# Altium PCB PCB1.PcbDoc
Units mm, origin at the board's own origin, x right, y up, seen from the top; angles counter-clockwise.
Board outline 55.75 x 63.12 mm, 2 copper layers (Top Layer, Bottom Layer); 26 components, 16 nets, 72 pads, 5 vias.
Unrouted connection lines stored in the file: 3.
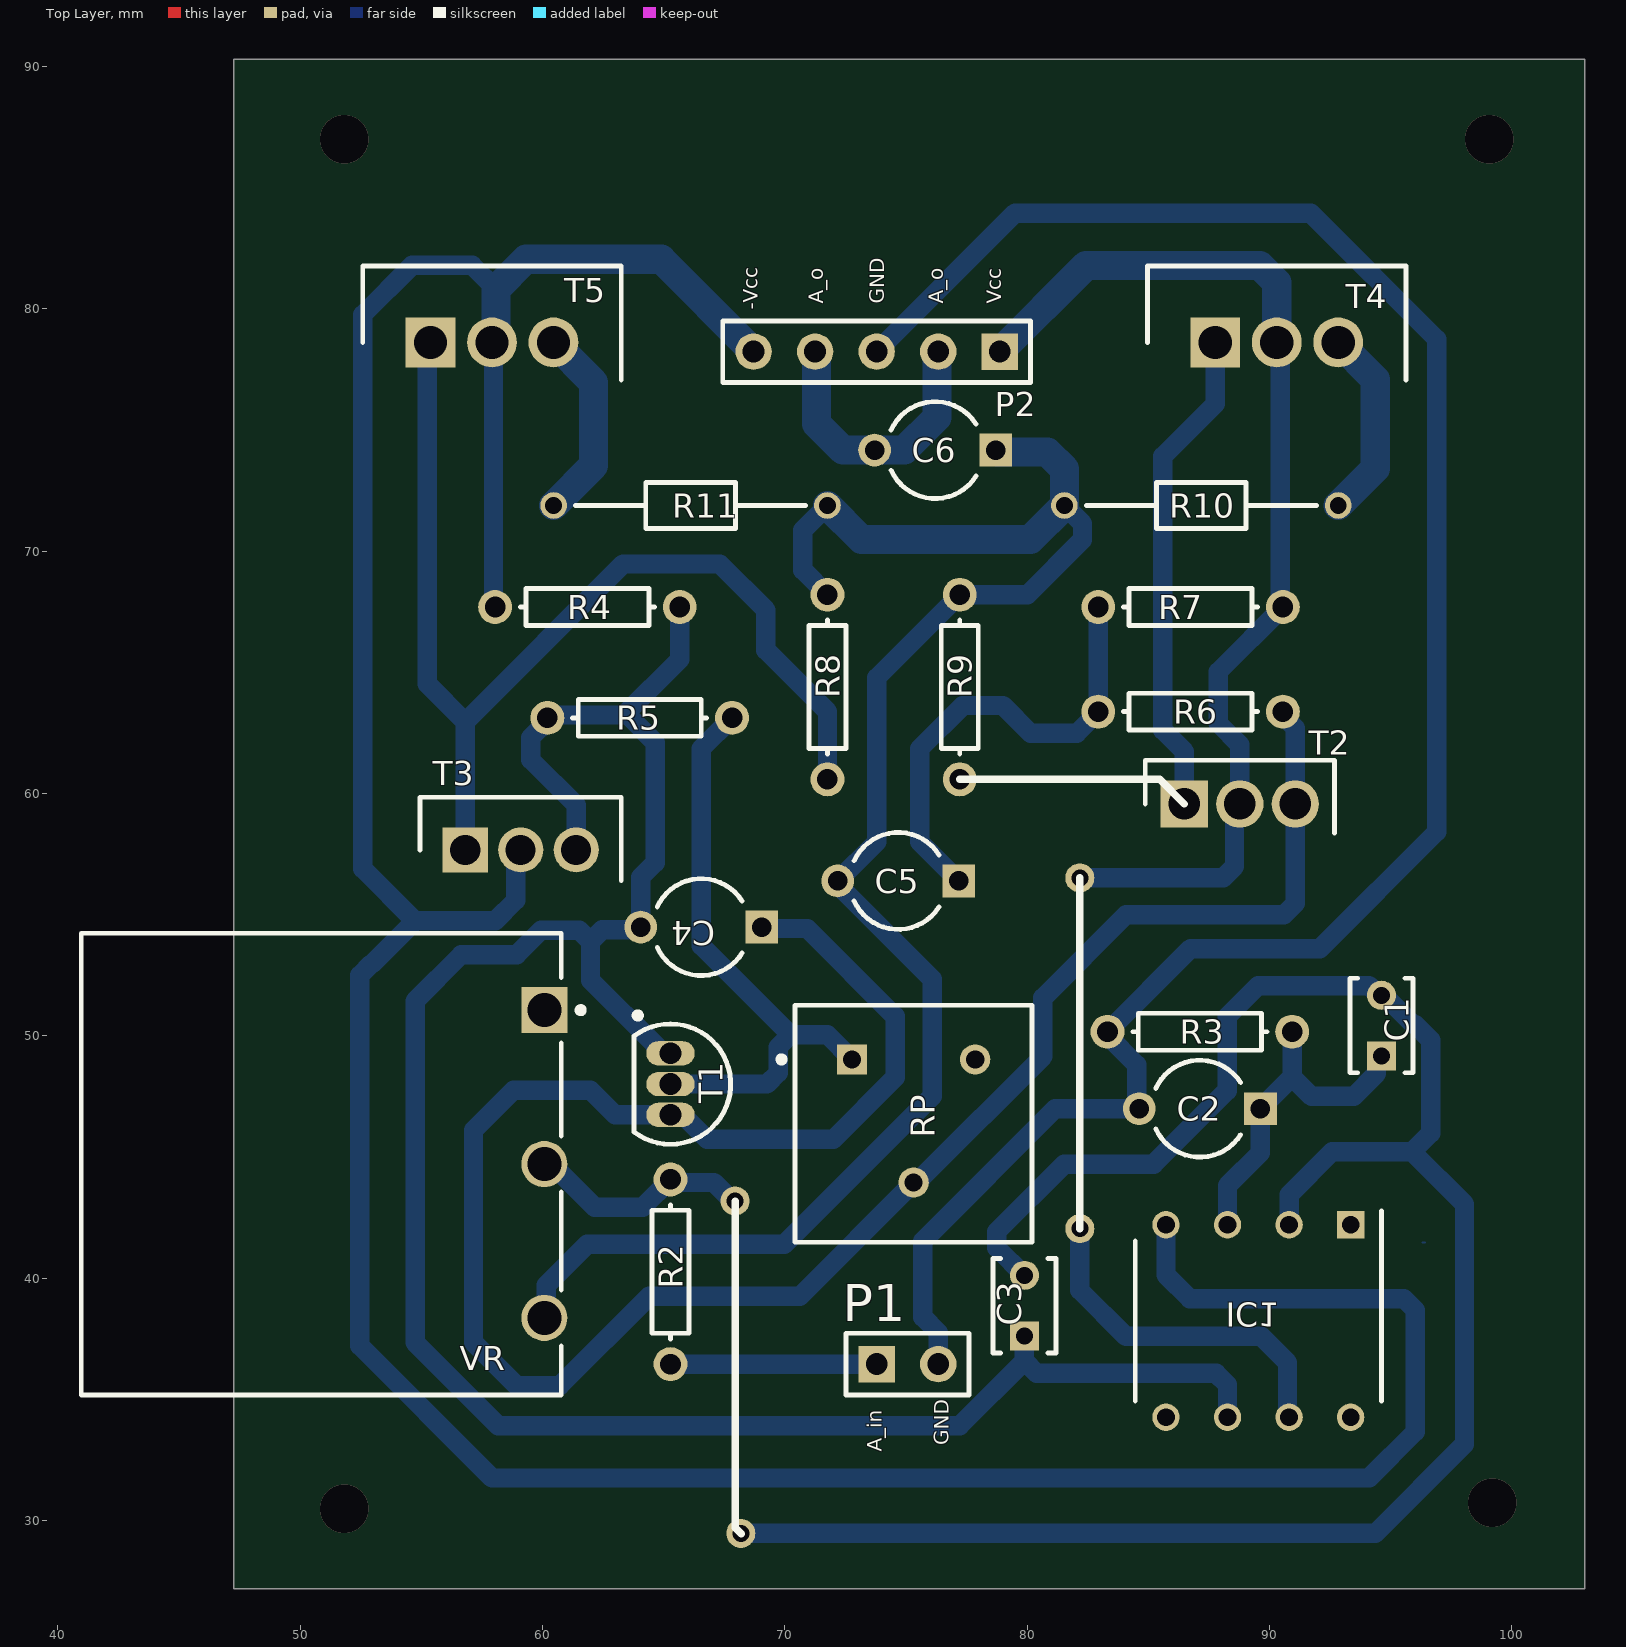
[diagram p0: Top Layer view]
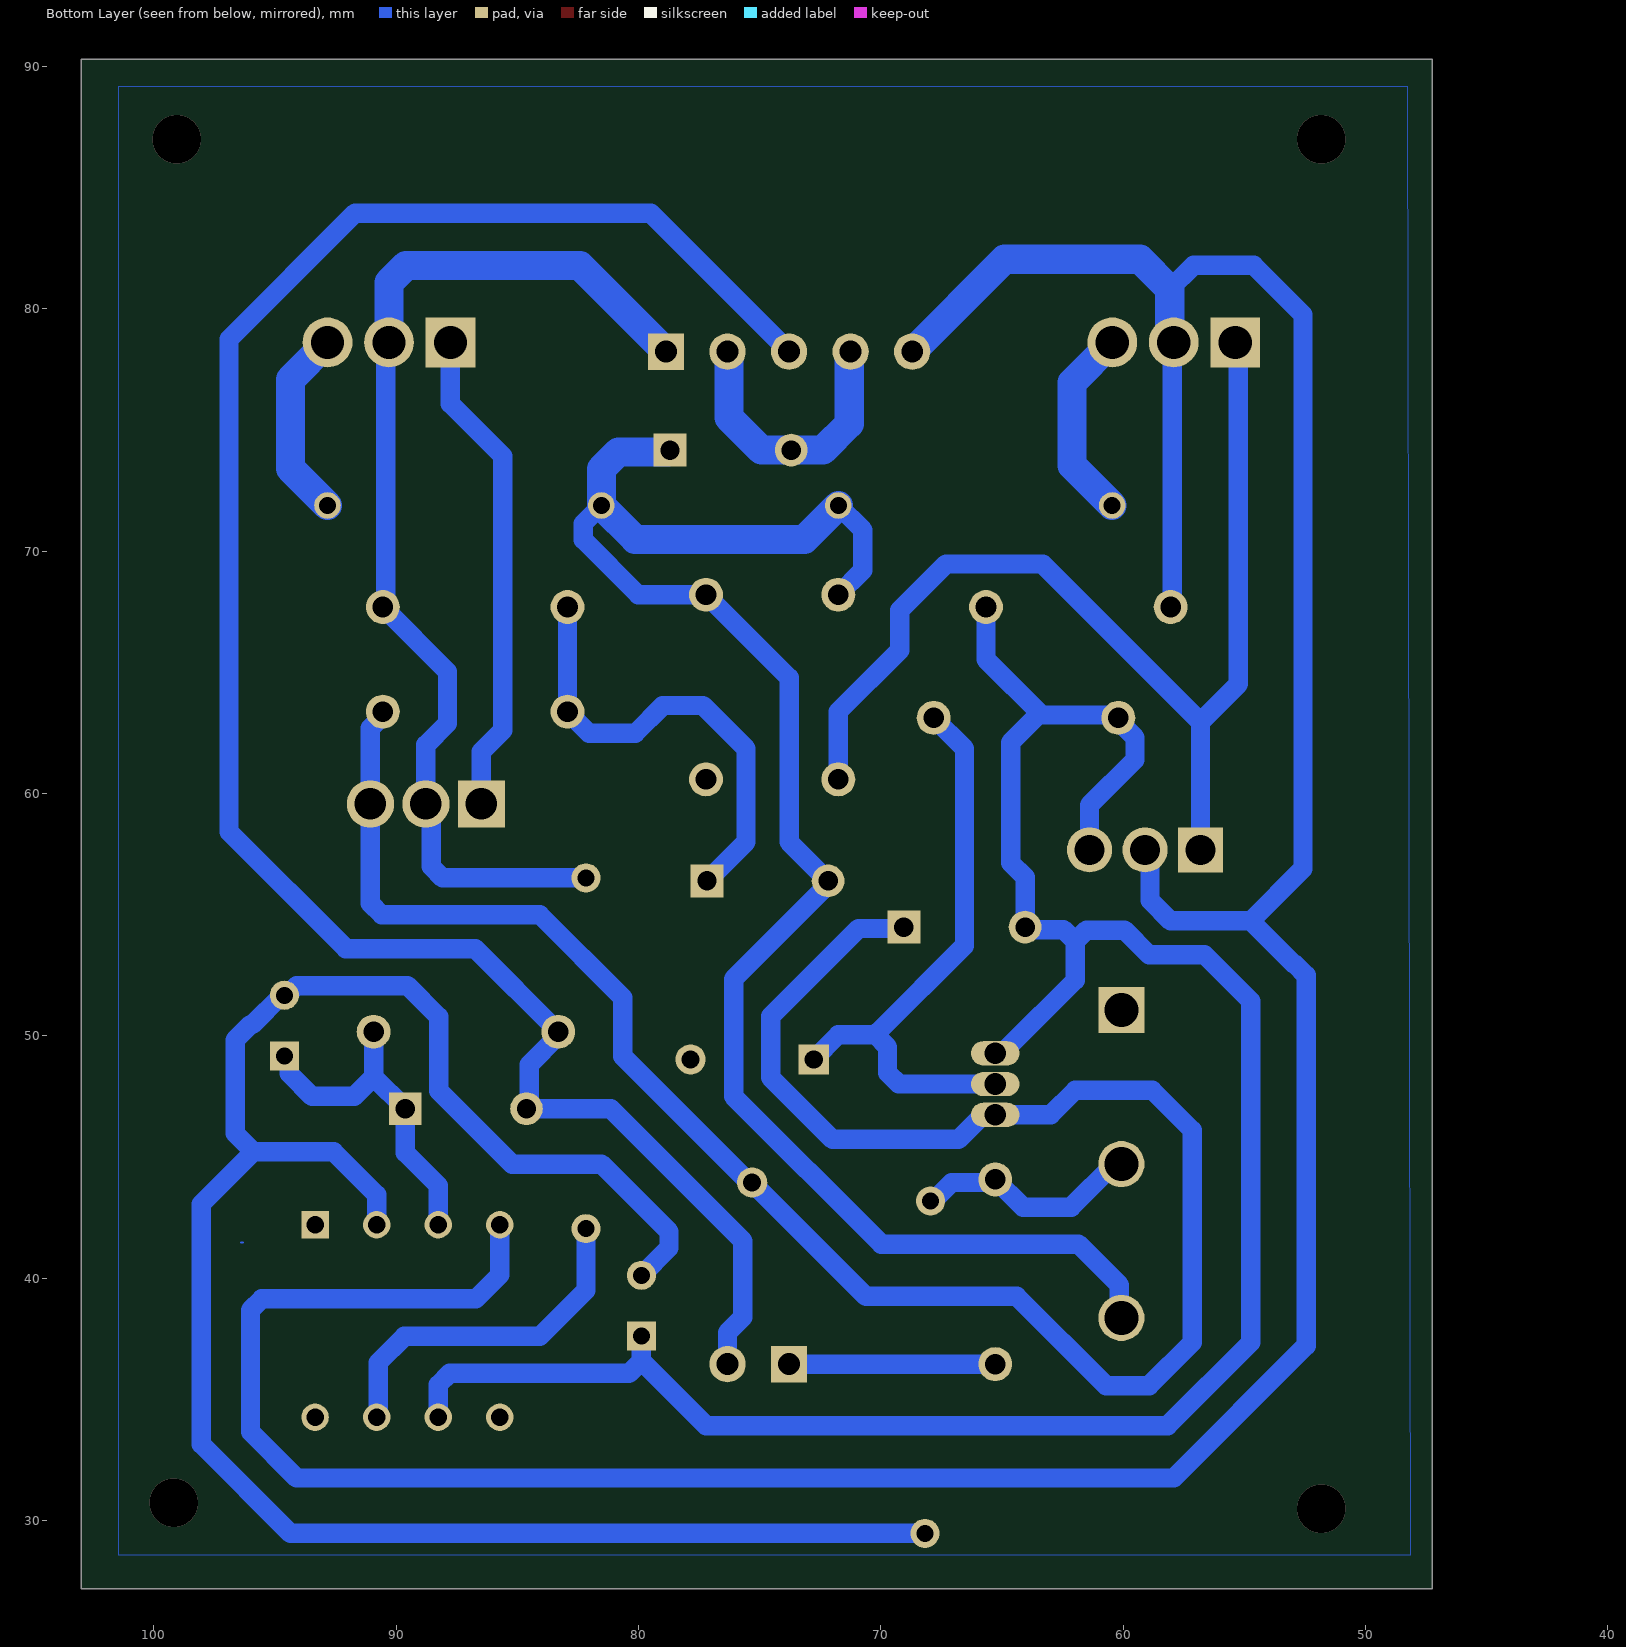
[diagram p1: Bottom Layer view, seen from below]

## Layer stack, top to bottom
Top Solder: solder mask 0.0102, Solder Resist, Dk 3.5
Top Layer: signal copper 0.0356
Dielectric 1: dielectric 0.32, FR-4, Dk 4.8
Bottom Layer: signal copper 0.0356
Bottom Solder: solder mask 0.0102, Solder Resist, Dk 3.5

## Board outline
47.244,27.178 47.244,90.297 102.997,90.297 102.997,27.178

## Design rules (kind name [scope] priority, off if disabled: settings)
Clearance [All] p1: gap=0.8 ignorepadtopadclearanceinfootprint=FALSE except(0: Arc-Hole Track-Hole SMDPad-Hole THPad-Hole Via-Hole Fill-Hole Poly-Hole Region-Hole Text-Hole; 0.3: Arc-SMDPad Arc-Via Arc-Text Track-SMDPad Track-Via Track-Text SMDPad-SMDPad SMDPad-Via SMDPad-Text THPad-Via THPad-Text Via-Via Text-Text; 0.6: Arc-Arc Arc-Track Arc-THPad Track-Track Track-THPad SMDPad-THPad THPad-THPad; 1: Via-Fill Via-Poly Via-Region Fill-Fill Fill-Poly Fill-Region Poly-Poly Poly-Region Region-Region)
PolygonConnect [All] p1: connectstyle=Relief reliefconductorwidth=0.254 reliefentries=4 polygonreliefangle="90 Angle" airgapwidth=0.254
RoutingVias [All] p1: holewidth=0.711 width=1.27 viastyle="Through Hole" minholewidth=0.711 minwidth=1.27 maxholewidth=0.711 maxwidth=1.27
SolderMaskExpansion [All] p1: expansion=0.102 istentingtop=FALSE
Width [All] p1: maxlimit=1.2 minlimit=0.65 preferedwidth=0.8 minimp=50.000000 maximp=50.000000 favimp=50.000000
30 further rules are at their usual default settings.

## Components (designator, comment, footprint, x,y, rotation, side; value= is the part's Value field where it differs from the comment)
C1 "100pF" FP-RHS0DG-MFG 94.615,50.419 r90 top
C2 "Cap2" CAPR5-4X5 87.122,46.99 r180 top value=20uF
C3 "100pF" FP-RHS0DG-MFG 79.883,38.862 r90 top
C4 "Cap2" CAPR5-4X5 66.548,54.483 r180 top value=100uF
C5 "Cap2" CAPR5-4X5 74.676,56.388 r180 top value=100uF
C6 "Cap2" CAPR5-4X5 76.2,74.168 r180 top value=100uF
IC1 "TL071ACP" DIP794W53P254L959H508Q8N 89.535,38.227 r270 top
P1 "Header 2" HDR1X2 73.787,36.449 r0 top
P2 "Header 5" HDR1X5 78.867,78.232 r180 top
R2 "Res1" AXIAL-0.3 65.278,40.259 r270 top value=10k
R3 "Res1" AXIAL-0.3 87.122,50.165 r180 top value=10k
R4 "Res1" AXIAL-0.3 61.849,67.691 r0 top value=10k
R5 "Res1" AXIAL-0.3 64.008,63.119 r0 top value=1k
R6 "Res1" AXIAL-0.3 86.741,63.373 r180 top value=10K
R7 "Res1" AXIAL-0.3 86.741,67.691 r0 top value=10K
R8 "Res1" AXIAL-0.3 71.755,64.389 r90 top value=5.6k
R9 "Res1" AXIAL-0.3 77.216,64.389 r270 top value=5.6K
R10 "2.2ohm" RESAD1130W50L370D190 81.534,71.882 r0 top
R11 "2.2ohm" RESAD1130W50L370D190 60.455,71.882 r0 top
RP "3386F-1-303LF" FP-3386F-MFG 75.311,46.367 r0 top value=30kΩ
T1 "2N3904" TO-92A 65.278,48.006 r180 top
T2 "BD139" TO229P300X760X1364-3P 86.483,59.563 r0 top
T3 "BD140" TO229P345X800X1460-3P 56.807,57.669 r0 top
T4 "TIP31C" TO254P470X1016X2019-3P 87.762,78.613 r0 top
T5 "TIP32A" TO254P470X1016X2019-3P 55.377,78.613 r0 top
VR "100k" BOUR-3852A-282-103AL-3_V 60.071,44.704 r270 top

## Footprints (in the part's own frame and the unit in brackets; to place one, negate y for a bottom-side part, rotate by r counter-clockwise, add the part's x,y. Pads: shape width x height; smd on the part's side, far side on the other; paste and mask are expansions set on the pad)
AXIAL-0.3 [mm] "Axial Device, Thru-Hole; 2 Leads; 0.3 in Pin Spacing"
  round 1.4 hole 0.85: 1(-3.81,0) 2(3.81,0)
  silkscreen extent -2.77,-0.76 2.77,0.76
BOUR-3852A-282-103AL-3_V [mm] "TH, 3-Leads, Body 19.81x19.05mm, Pitch 6.35mm"
  rect 1.9x1.9 hole 1.4: 1(-6.35,0)
  round 1.9 hole 1.4: 2(0,0) 3(6.35,0)
  silkscreen extent -9.53,-19.11 9.53,1.63, body extent -9.52,-19.11 9.52,0.7, height 19.05
CAPR5-4X5 [mm] "Capacitor; 2 Leads"
  rect 1.35x1.35 hole 0.8: 1(-2.5,0)
  round 1.35 hole 0.8: 2(2.5,0)
  silkscreen extent -1.69,-2 1.82,2
DIP794W53P254L959H508Q8N [mm]
  rect 1.13x1.13 hole 0.73: 1(-3.97,3.81)
  round 1.13 hole 0.73: 2(-3.97,1.27) 3(-3.97,-1.27) 4(-3.97,-3.81) 5(3.97,-3.81) 6(3.97,-1.27) 7(3.97,1.27) 8(3.97,3.81)
  silkscreen extent -4.54,-5.08 3.3,5.08, body extent -4.1,-4.64 4.1,4.64, height 4.21
FP-3386F-MFG [mm]
  rect 1.25x1.25 hole 0.75 paste-1000 mask+0: 1(-2.54,2.655)
  round 1.25 hole 0.75 paste-1000 mask+0: 2(0,-2.425) 3(2.54,2.655)
  silkscreen extent -5.57,-4.89 4.89,4.89, body extent -4.99,-4.99 4.99,4.99, height 0.25
FP-RHS0DG-MFG [mm]
  rect 1.2x1.2 hole 0.7 paste-1000 mask+0: 1(-1.25,0)
  round 1.2 hole 0.7 paste-1000 mask+0: 2(1.25,0)
  silkscreen extent -1.95,-1.3 1.95,1.3, body extent -2.05,-1.4 2.05,1.4, height 0.25
HDR1X2 [mm] "Connector; Header; 2 Position"
  rect 1.5x1.5 hole 0.9: 1(0,0)
  round 1.5 hole 0.9: 2(2.54,0)
  silkscreen extent -1.27,-1.27 3.81,1.27
HDR1X5 [mm] "Connector; Header; 5 Position"
  rect 1.5x1.5 hole 0.9: 1(0,0)
  round 1.5 hole 0.9: 2(2.54,0) 3(5.08,0) 4(7.62,0) 5(10.16,0)
  silkscreen extent -1.27,-1.27 11.43,1.27
RESAD1130W50L370D190 [mm]
  round 1.1 hole 0.7: 1(0,0) 2(11.3,0)
  silkscreen extent 0.9,-0.95 10.4,0.95, body extent -0.25,-0.95 11.55,0.95, height 1.89
TO229P300X760X1364-3P [mm]
  rect 1.95x1.95 hole 1.3: 1(0,0)
  round 1.95 hole 1.3: 2(2.29,0) 3(4.58,0)
  silkscreen extent -1.61,-1.2 6.19,1.8, body extent -1.51,-1.19 6.09,1.81, height 12.76
TO229P345X800X1460-3P [mm]
  rect 1.86x1.86 hole 1.24: 1(0,0)
  round 1.86 hole 1.24: 2(2.29,0) 3(4.58,0)
  silkscreen extent -1.86,-1.27 6.44,2.18, body extent -1.71,-1.28 6.29,2.17, height 14.2
TO254P470X1016X2019-3P [mm]
  rect 2.055x2.055 hole 1.37: 1(0,0)
  round 2.055 hole 1.37: 2(2.535,0) 3(5.07,0)
  silkscreen extent -2.8,-1.55 7.87,3.15, body extent -2.55,-1.55 7.61,3.15, height 18.54
TO-92A [mm] "TO, Flat Index; 3 In-Line, Axial Leads; Body Dia. 4.5mm; Leads 0.51 x 0.48 mm (max)"
  oval 2x1 hole 0.9: 1(0,-1.27) 2(0,0) 3(0,1.27)
  silkscreen extent -2.48,-2.95 1.5,2.48, body extent -2.48,-2.5 1.5,2.5, height 6.86

## Part data
C1 C3: library part CMP-06035-000016-1, "CAP CER 100PF 100V CCG THRUHOLE", Manufacturer=Murata, Manufacturer Part Number=RHS7G2A101J0DGH01A, Package=RHS0DG, Temperature="-55°C to +200°C", Temperature Characteristic=CCG, Temperature Coefficient=72ppm/°C, Temperature Range High=+200°C, Temperature Range Low=-55°C, Tolerance=5%, Voltage Rating=100V, Automotive=Yes, Automotive Grade="Grade 0", Capacitance=100pF, Category=Cap, ComponentLink2Description=Datasheet, ComponentLink2URL=https://search.murata.co.jp/Ceramy/image/img/A01X/G101/ENG/RHS_CCG_100V_E.pdf, Device Class L1="Passive Components", Device Class L2=Capacitors, Device Class L3="Ceramic Capacitors", Digikey Description="CAP CER 100PF 100V CCG THRUHOLE", Height=5mm, Lead Free=Yes, Material=Ceramic, Octopart=https://octopart.com/rhs7g2a101j0dgh01a-murata-91590056, RoHS=TRUE
C2 C4 C5 C6: "Capacitor", PackageDescription="Capacitor; 2 Leads", PackageReference=CAPR5-4X5, Published=23-Sep-2002, Publisher="Altium Limited"
IC1: "Integrated Circuit", Manufacturer_Name="Texas Instruments", Mouser Part Number=595-TL071ACP, Arrow Part Number=TL071ACP, Arrow Price/Stock=https://www.arrow.com/en/products/tl071acp/texas-instruments?region=nac, Datasheet Link=http://www.ti.com/lit/ds/symlink/tl071a.pdf, Height=5.08mm, Manufacturer_Part_Number=TL071ACP, Mouser Price/Stock=https://www.mouser.co.uk/ProductDetail/Texas-Instruments/TL071ACP?qs=FM6NhYOeeBXD6FjYObfIhg%3D%3D
P1: "Header, 2-Pin", LatestRevisionDate=17-Jul-2002, LatestRevisionNote="Re-released for DXP Platform.", Publisher="Altium Limited"
P2: "Header, 5-Pin", LatestRevisionDate=17-Jul-2002, LatestRevisionNote="Re-released for DXP Platform.", Publisher="Altium Limited"
R2 R3 R4 R5 R6 R7 R8 R9: "Resistor", LatestRevisionDate=17-Jul-2002, LatestRevisionNote="Re-released for DXP Platform.", PackageDescription="Axial Device, Thru-Hole; 2 Leads; 0.3 in Pin Spacing", PackageReference=AXIAL-0.3, Published=8-Jun-2000, Publisher="Altium Limited"
R10 R11: library part MFF04FF6800A5, "Resistor", Manufacturer_Name=ROYALOHM, Datasheet Link=https://www.tme.eu/Document/353a4c49cd04d4760ab7ace851501ebe/metal_film.pdf, Manufacturer_Part_Number=MFF04FF6800A5
RP: library part CMP-07234-000018-1, "TRIMMER 30K OHM 0.5W PC PIN TOP", Manufacturer=Bourns, Package=3386F, Power Rating=0.5W, Resistance=30kΩ, Temperature="-55°C to +125°C", Temperature Coefficient=100ppm/°C, Temperature Range High=+125°C, Temperature Range Low=-55°C, Tolerance=10%, Voltage Rating=300V, Automotive=No, Category=Res, ComponentLink2Description=Datasheet, ComponentLink2URL=https://www.bourns.com/docs/Product-Datasheets/3386.pdf, Composition=Cermet, Device Class L1="Passive Components", Device Class L2=Resistors, Device Class L3="Variable Resistors and Potentiometers", Digikey Description="TRIMMER 30K OHM 0.5W PC PIN TOP", Height=5.08mm, Lead Free=Yes, Manufacturer Part Number=3386F-1-303LF, Mouser Description="Trimmer Resistors - Through Hole 3/8 30Kohms 10% 0.5Watts Square", Octopart=https://octopart.com/3386f-1-303lf-bourns-1032328, RoHS=TRUE, Series=3386, Standoff Height=0.38mm
T1: "NPN General Purpose Amplifier", ComponentLink1Description="Manufacturer Link", ComponentLink1URL=http://www.fairchildsemi.com/, ComponentLink2Description=Datasheet, ComponentLink2URL=http://www.fairchildsemi.com/ds/2N%2F2N3904.pdf, DatasheetVersion=1997, LatestRevisionDate=15-Jan-2003, LatestRevisionNote="PCB Footprint 'BCY-W3/D4.7' replaced", PackageDescription="TO, Flat Index; 3 In-Line, Axial Leads; Body Dia. 4.5mm; Leads 0.51 x 0.48 mm (max)", PackageReference=TO-92A, PackageVersion=Sep-1998, Published=8-Jun-2000, Publisher="Altium Limited"
T2: "Transistor BJT NPN", Manufacturer_Name="ON Semiconductor", Mouser Part Number=863-BD139, Datasheet Link=http://www.onsemi.com/pub/Collateral/BD135-D.PDF, Height=3mm, Manufacturer_Part_Number=BD139, Mouser Price/Stock=https://www.mouser.co.uk/ProductDetail/onsemi/BD139?qs=vNc2DXHODiI0%252BZZC8g2wVg%3D%3D
T3: library part BD14010STU, "Transistor BJT PNP", Manufacturer_Name="ON Semiconductor", Mouser Part Number=512-BD14010STU, Arrow Part Number=BD14010STU, Arrow Price/Stock=https://www.arrow.com/en/products/bd14010stu/on-semiconductor?region=nac, Datasheet Link=http://www.mouser.com/ds/2/149/BD140-888626.pdf, Height=3.45mm, Manufacturer_Part_Number=BD14010STU, Mouser Price/Stock=https://www.mouser.co.uk/ProductDetail/ON-Semiconductor-Fairchild/BD14010STU?qs=ljbEvF4DwOOnoRfj89Fh0g%3D%3D
T4: "Transistor BJT NPN", Manufacturer_Name=Bourns, Datasheet Link=https://www.mouser.com/datasheet/2/149/fairchild%20semiconductor_tip31a-549394.pdf, Height=4.7mm, Manufacturer_Part_Number=TIP31C
T5: "Transistor BJT PNP", Manufacturer_Name="ON Semiconductor", Mouser Part Number=512-TIP32A, Arrow Part Number=TIP32A, Arrow Price/Stock=https://www.arrow.com/en/products/tip32a/on-semiconductor, Datasheet Link=https://www.jameco.com/Jameco/Products/ProdDS/33064.pdf, Height=4.7mm, Manufacturer_Part_Number=TIP32A, Mouser Price/Stock=https://www.mouser.co.uk/ProductDetail/ON-Semiconductor-Fairchild/TIP32A?qs=P36CEcFBmYytOK49o0vnfw%3D%3D
VR: library part CMP-2000-05079-1, "Diameter Panel Control, 10 KOhm, +/- 10%, 2 W, -1 to 125 degC, 3-Pin THD, RoHS, Bulk", Manufacturer=Bourns, Power (Watts)=2W, Resistance (Ohms)=10k, Resistive Material=Cermet, Standard Package=45, Temperature Coefficient=±150ppm/degC, Tolerance=±10%, Actuator Diameter="0.250\"(6.35mm)", Actuator Length="0.875\"(22.23mm)", Actuator Type=Slotted, Associated Product="36-8560-ND / -KNOBINSTRUMW/DIALRND.9\"DIA / 36-8555-ND / -KNOBINSTRUMSKIRTEDRND.7\"DIA / 36-8556-ND / -KNOBINSTRUMSKIRTEDRND.9\"DIA / 36-8565-ND / -KNOBINSTRUMDBLBARRND.7\"DIA / 36-8566-ND / -KNOBINSTRUMDBLBARRND.9\"DIA / 36-8568-ND / -KNOBINSTRUMSGLBARRND.7\"DIA / 36-8569-ND / -KNOBINSTRUMSGLBARRND.9\"DIA / 36-8559-ND / -KNOBINSTRUMW/DIALRND.7\"DIA / 226-1006-ND / -KNOBBLKGLOSS.75\"DIA.250\"SHAFT / 226-1007-ND / -KNOBBLKGLOSS.925\"DIA.250\"SHAFT / 226-1011-ND / -KNOBBLKGLOS", Built in Switch=None, Bushing Thread=3/8-32, Catalog Drawings="3852SeriesSide1 /  / 3852SeriesSide2", Category=Potentiometers,VariableResistors, Datasheet URL=https://datasheet.ciiva.com/11831/0900766b80f93b4b-11831016.pdf, Datasheet Version=Sep-14, Family=RotaryPotentiometers,Rheostats, Manufacturer URL=http://www.bourns.com/, Mounting Type=PanelMount, Number of Gangs=1, Number of Turns=1, Online Catalog=3852and3856Series, Other Names=3852A282103AL, Packaging=Bulk, PCN Design/Specification=PBTResinJun/2011, PCN Other=MultipleChanges01/Dec/2012, RoHS Information=3852A-LMaterialDeclaration, Rotation=280deg, Series=3852, Taper=Linear, Termination Style=SolderLug

## Free pads (board coordinates)
  round 1.2 hole 0.7: 7(82.169,42.037) 8(68.18,29.464) 9(67.945,43.18) 10(82.169,56.515)

## Via types
v1: diameter 2/2 (per signal layer), hole 2, Top Layer to Bottom Layer, 2 vias
v2: diameter 2, hole 2, Top Layer to Bottom Layer, 2 vias
v3: diameter 1.27, hole 0.711, Top Layer to Bottom Layer, 1 vias

## Nets (pads, with @x,y where several pads share a name; then routed paths per layer and width w, separated by ;. In a path a pad name is that pad's centre, name@x,y a point inside that pad or via, vN(x,y) a via of type N, cw(c..) or ccw(c..) an arc to the next point about the centre after c; other vN are vias at no path point)
"Audio IN": P1.1 R2.2 | length 8.5
  Bottom Layer w0.8: R2.2 P1.1
"Audio Out": C6.2 P2.2 P2.4 | length 11.7
  Bottom Layer w1.2: P2.4 71.304,78.175 71.304,75.254 72.39,74.168 74.93,74.168 76.27,75.508 76.27,78.175 P2.2
GND: C2.2 P1.2 P2.3 R3.2 | length 85.2
  Bottom Layer w0.8: P2.3 79.502,83.947 91.694,83.947 96.901,78.74 96.901,58.42 92.075,53.594 86.741,53.594 R3.2 83.312,50.003 84.517,48.798 84.517,47.095 C2.2 81.153,46.99 75.692,41.529 75.692,38.386 76.327,37.751 P1.2
NetC1_1: C1.1 C2.1 IC1.3 R3.1 | length 14.1
  Bottom Layer w0.8: IC1.3 88.265,43.815 89.622,45.172 C2.1 90.932,48.3 ; R3.1 90.932,48.3 ; C1.1 94.415,48.969 94.415,48.441 93.472,47.498 91.734,47.498 90.932,48.3
NetC1_2: C1.2 C3.2 IC1.2 pad.8 pad.9 R2.1 VR.2 | length 92.9
  Bottom Layer w0.8: VR.2 60.369,44.704 62.147,42.926 64.135,42.926 R2.1 65.393,43.954 65.817,43.954 65.829,43.942 67.075,43.942 67.837,43.18 pad.9 ; pad.8 94.361,29.464 98.044,33.147 98.044,43.053 95.885,45.212 ; C3.2 78.744,41.251 78.744,41.914 81.534,44.704 85.217,44.704 88.247,47.734 88.247,50.782 89.535,52.07 94.106,52.07 94.507,51.669 94.723,51.669 95.931,50.461 96.009,50.461 96.647,49.823 96.647,45.974 95.885,45.212 ; IC1.2 90.805,43.434 92.583,45.212 95.885,45.212
NetC3_1: C3.1 C4.2 IC1.6 R4.2 R5.1 T1.1 T3.3 | length 94.9
  Bottom Layer w0.8: T3.3 61.387,59.517 59.513,61.391 59.513,62.301 60.198,62.985 R5.1 60.313,63.234 63.361,63.234 ; T1.1 64.832,49.276 64.74,49.368 64.74,49.528 61.976,52.292 61.976,53.887 ; R4.2 65.659,65.532 63.361,63.234 ; C3.1 79.883,36.576 ; IC1.6 88.265,35.599 87.796,36.068 80.391,36.068 79.883,36.576 ; 61.976,53.887 62.466,54.378 63.943,54.378 C4.2 64.048,56.545 64.643,57.14 64.643,62.103 63.512,63.234 63.361,63.234 ; 61.976,53.887 61.507,54.356 59.944,54.356 58.928,53.34 56.642,53.34 54.737,51.435 54.737,37.338 58.166,33.909 77.216,33.909 79.883,36.576
NetC4_1: C4.1 R6.1 RP.2 T1.3 T2.3 | length 90.7
  Bottom Layer w0.8: C4.1 69.105,54.426 70.923,54.426 74.549,50.8 74.549,48.277 71.992,45.72 66.794,45.72 65.843,46.671 65.343,46.671 T1.3 62.992,46.736 61.976,47.752 58.801,47.752 57.15,46.101 57.15,37.338 58.928,35.56 60.706,35.56 64.389,39.243 70.612,39.243 RP.2 75.433,43.942 75.658,44.167 75.663,44.167 80.645,49.149 80.645,51.562 84.074,54.991 90.594,54.991 91.063,55.46 T2.3 91.063,62.699 90.551,63.211 R6.1
NetC5_1: C5.1 R6.2 R7.1 | length 19.4
  Bottom Layer w0.8: C5.1 75.565,57.999 75.565,61.849 77.343,63.627 78.994,63.627 80.137,62.484 82.042,62.484 R6.2 R7.1
NetC5_2: C5.2 C6.1 R8.2 R9.1 R10.1 R11.2 VR.3 | length 72.8
  Bottom Layer w0.8: VR.3 60.156,38.439 60.156,39.709 61.849,41.402 69.977,41.402 76.073,47.498 76.073,52.342 72.176,56.239 C5.2 73.787,57.999 73.787,64.77 R9.1 80.01,68.199 82.282,70.471 82.282,71.134 R10.1 ; v3(71.755,68.199) 70.739,69.215 70.739,70.866 R11.2
  Bottom Layer w1.2: R11.2 73.152,70.485 80.137,70.485 R10.1 81.534,73.39 80.831,74.093 78.775,74.093 C6.1
NetR5_2: R5.2 RP.1 T1.2 | length 24.5
  Bottom Layer w0.8: T1.2 69.254,48.006 69.723,48.475 69.723,49.53 70.231,50.038 ; R5.2 66.548,61.849 66.548,53.721 70.104,50.165 70.231,50.038 ; RP.1 71.755,50.038 70.231,50.038
NetR8_1: R8.1 T3.1 T5.1 | length 45.6
  Bottom Layer w0.8: T5.1 55.245,78.481 55.245,64.516 56.807,62.954 ; T3.1 56.807,62.954 ; R8.1 71.755,63.373 69.215,65.913 69.215,67.564 67.31,69.469 63.322,69.469 56.807,62.954
NetR9_2: R9.2 T2.1 T4.1 | length 20.3
  Bottom Layer w0.8: T2.1 86.483,61.726 85.598,62.611 85.598,73.914 87.762,76.078 T4.1
NetR10_2: R10.2 T4.3 | length 8
  Bottom Layer w1.2: T4.3 94.361,77.084 94.361,73.409 R10.2
NetR11_1: R11.1 T5.3 | length 8.1
  Bottom Layer w1.2: T5.3 62.103,76.957 62.103,73.53 R11.1
VCC(+12V): IC1.7 P2.1 pad.7 pad.10 R7.2 T2.2 T4.2 | length 60.2
  Bottom Layer w0.8: pad.7 82.169,39.497 84.074,37.592 89.662,37.592 90.742,36.512 90.742,34.32 IC1.7 ; pad.10 88.084,56.515 88.553,56.984 88.553,59.343 T2.2 88.773,62.004 87.883,62.894 87.883,65.023 R7.2 90.436,67.806 90.436,78.474 T4.2
  Bottom Layer w1.2: P2.1 82.423,81.788 89.594,81.788 90.297,81.085 T4.2
VCC(-12V): IC1.4 P2.5 R4.1 T3.2 T5.2 | length 148.4
  Bottom Layer w0.8: T5.2 57.975,78.549 57.975,67.754 R4.1 ; 58.076,80.809 57.096,81.788 54.61,81.788 52.578,79.756 52.578,56.896 54.737,54.737 ; T3.2 58.894,57.466 58.894,55.592 58.039,54.737 54.737,54.737 ; IC1.4 85.725,40.132 86.711,39.146 95.543,39.146 96.012,38.677 96.012,33.655 94.107,31.75 57.912,31.75 52.451,37.211 52.451,52.49 52.92,52.959 52.959,52.959 54.737,54.737
  Bottom Layer w1.2: T5.2 58.076,78.777 58.076,80.809 59.309,82.042 64.897,82.042 P2.5
pads on no net: IC1.1 IC1.5 IC1.8 RP.3 VR.1
copper on no net: | length 0.1
  Bottom Layer w0.1: 96.326,41.465 96.402,41.465
  Bottom Layer w0.8: 86.356,59.69 86.36,59.686 86.36,59.69
  other v1: 51.816,86.995 99.06,86.995
  other v2: 51.816,30.48 99.187,30.734

## Polygon pours and split planes (outlines as drawn)
GND on Bottom Layer "GND_L02_P000" (solid, pour order 0): 48.26,89.154 101.473,89.154 101.473,28.575 48.133,28.575

## Silkscreen, mask and mechanical layers (free items; w line width, h text height)
Top Overlay:
  lines w0.3: 67.945,43.18 67.945,29.699 68.199,29.445 ; 77.216,60.579 85.467,60.579 86.483,59.563 ; 82.169,42.037 82.169,56.515
  text "A_o" at 71.582,80.21 h0.6 r90
  text "GND" at 74.095,80.21 h0.6 r90
  text "A_o" at 76.535,80.21 h0.6 r90
  text "Vcc" at 78.921,80.21 h0.6 r90
  text "-Vcc" at 68.888,79.956 h0.6 r90
  text "GND" at 76.762,33.093 h0.6 r90
  text "A_in" at 73.995,32.839 h0.6 r90
Mechanical 1:
  lines w0.1: 44.704,28.194 49.276,23.622 107.315,23.622 107.315,84.455 104.648,87.122 50.419,87.122 44.704,81.407 44.704,28.194
Top Assembly:
  the board outline again, w0.1